# Altium PCB usb_hub.PcbDoc
Units mil, origin at the board's own origin, x right, y up, seen from the top; angles counter-clockwise.
Board outline 1669.29 x 1637.8 mil, 2 copper layers (Top Layer, Bottom Layer); 19 components, 17 nets, 97 pads, 28 vias.
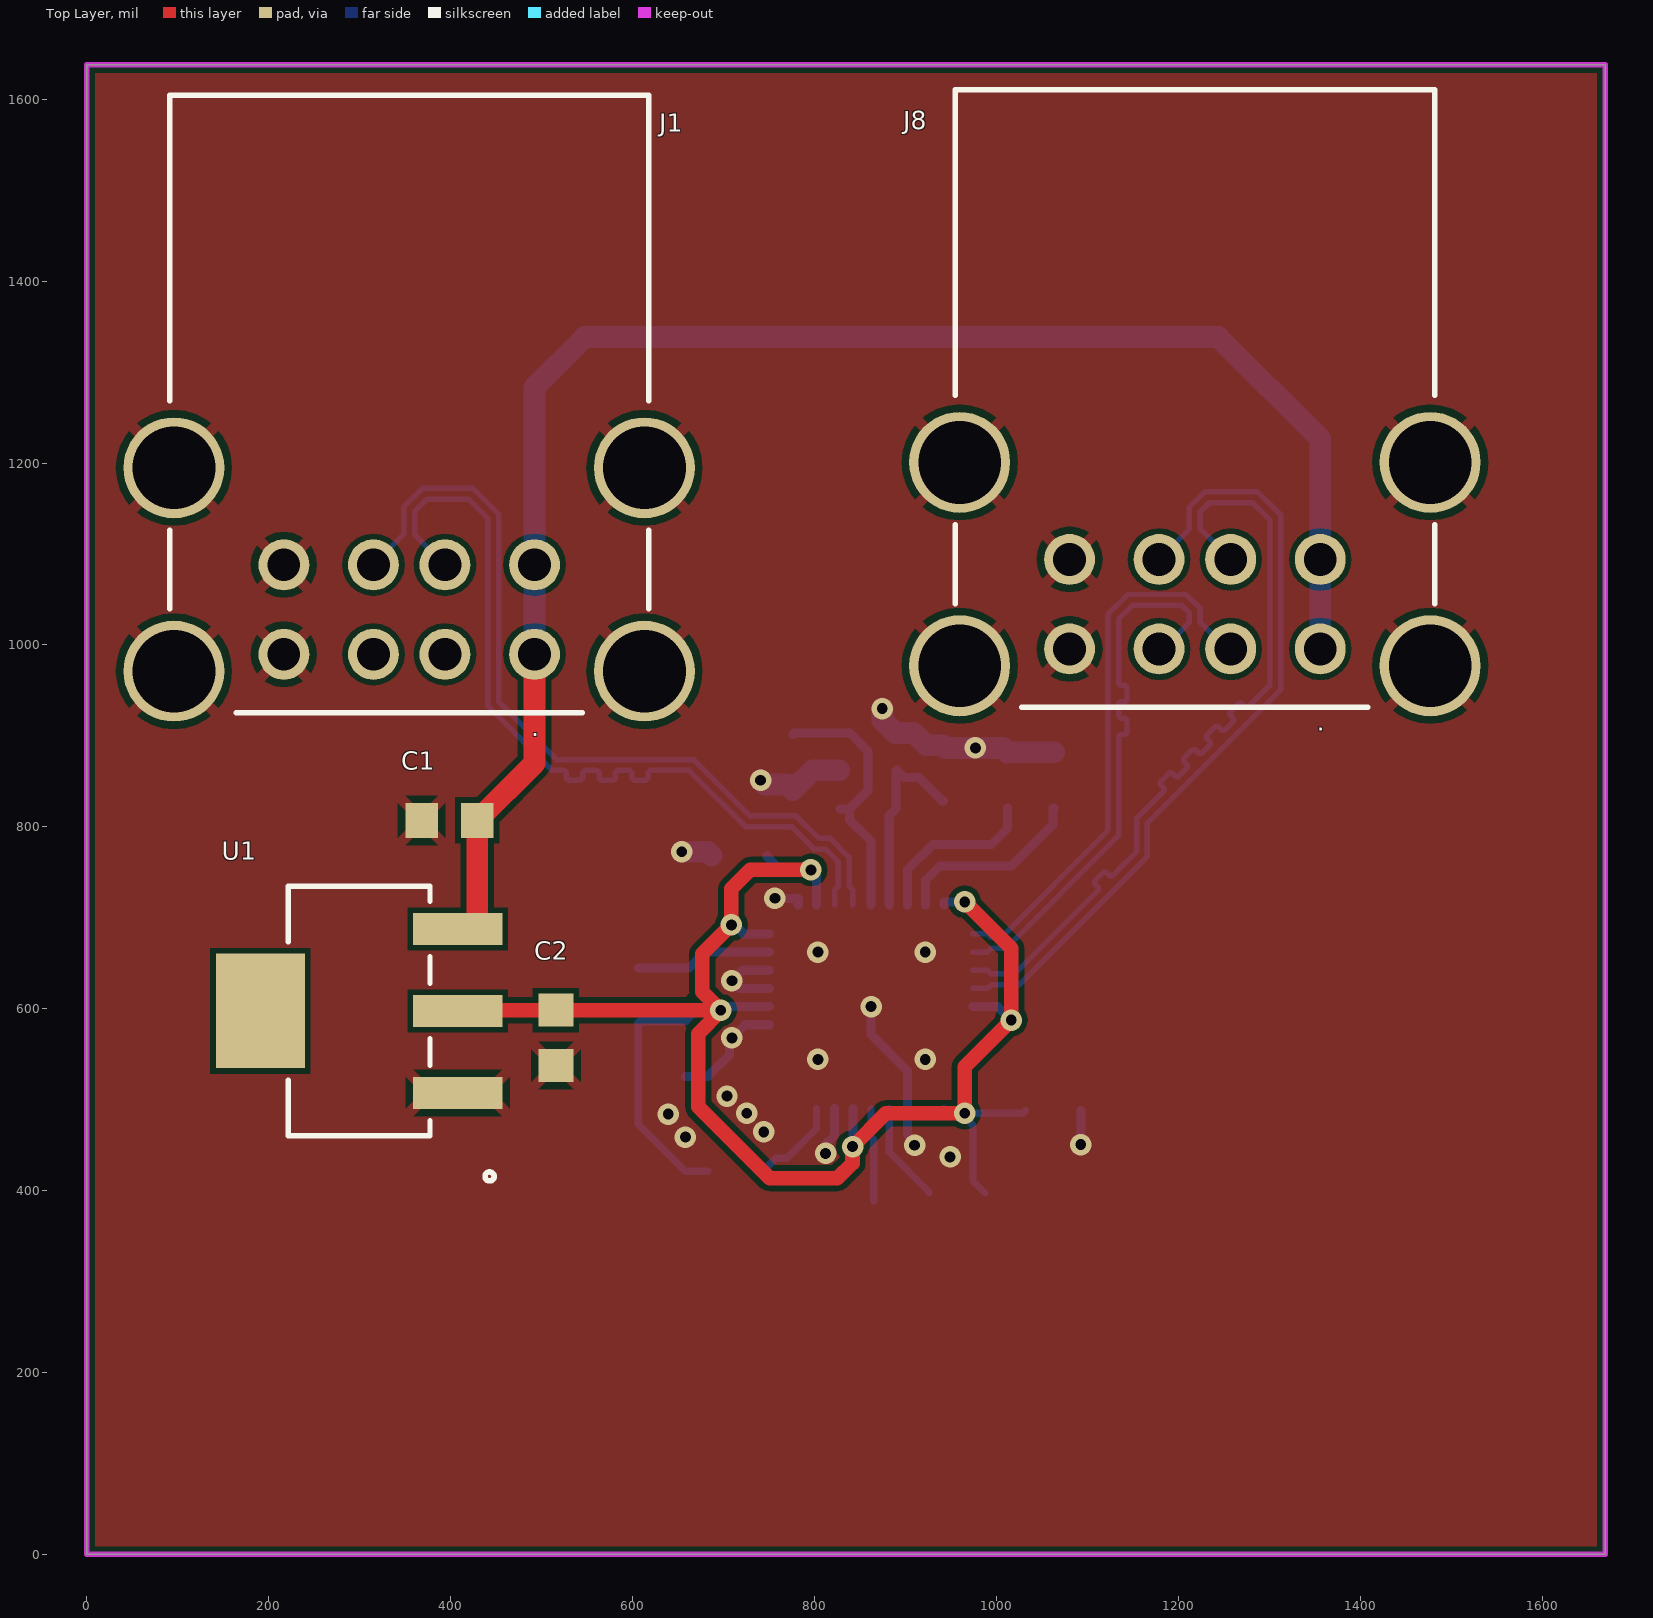
[diagram p0: Top Layer view]
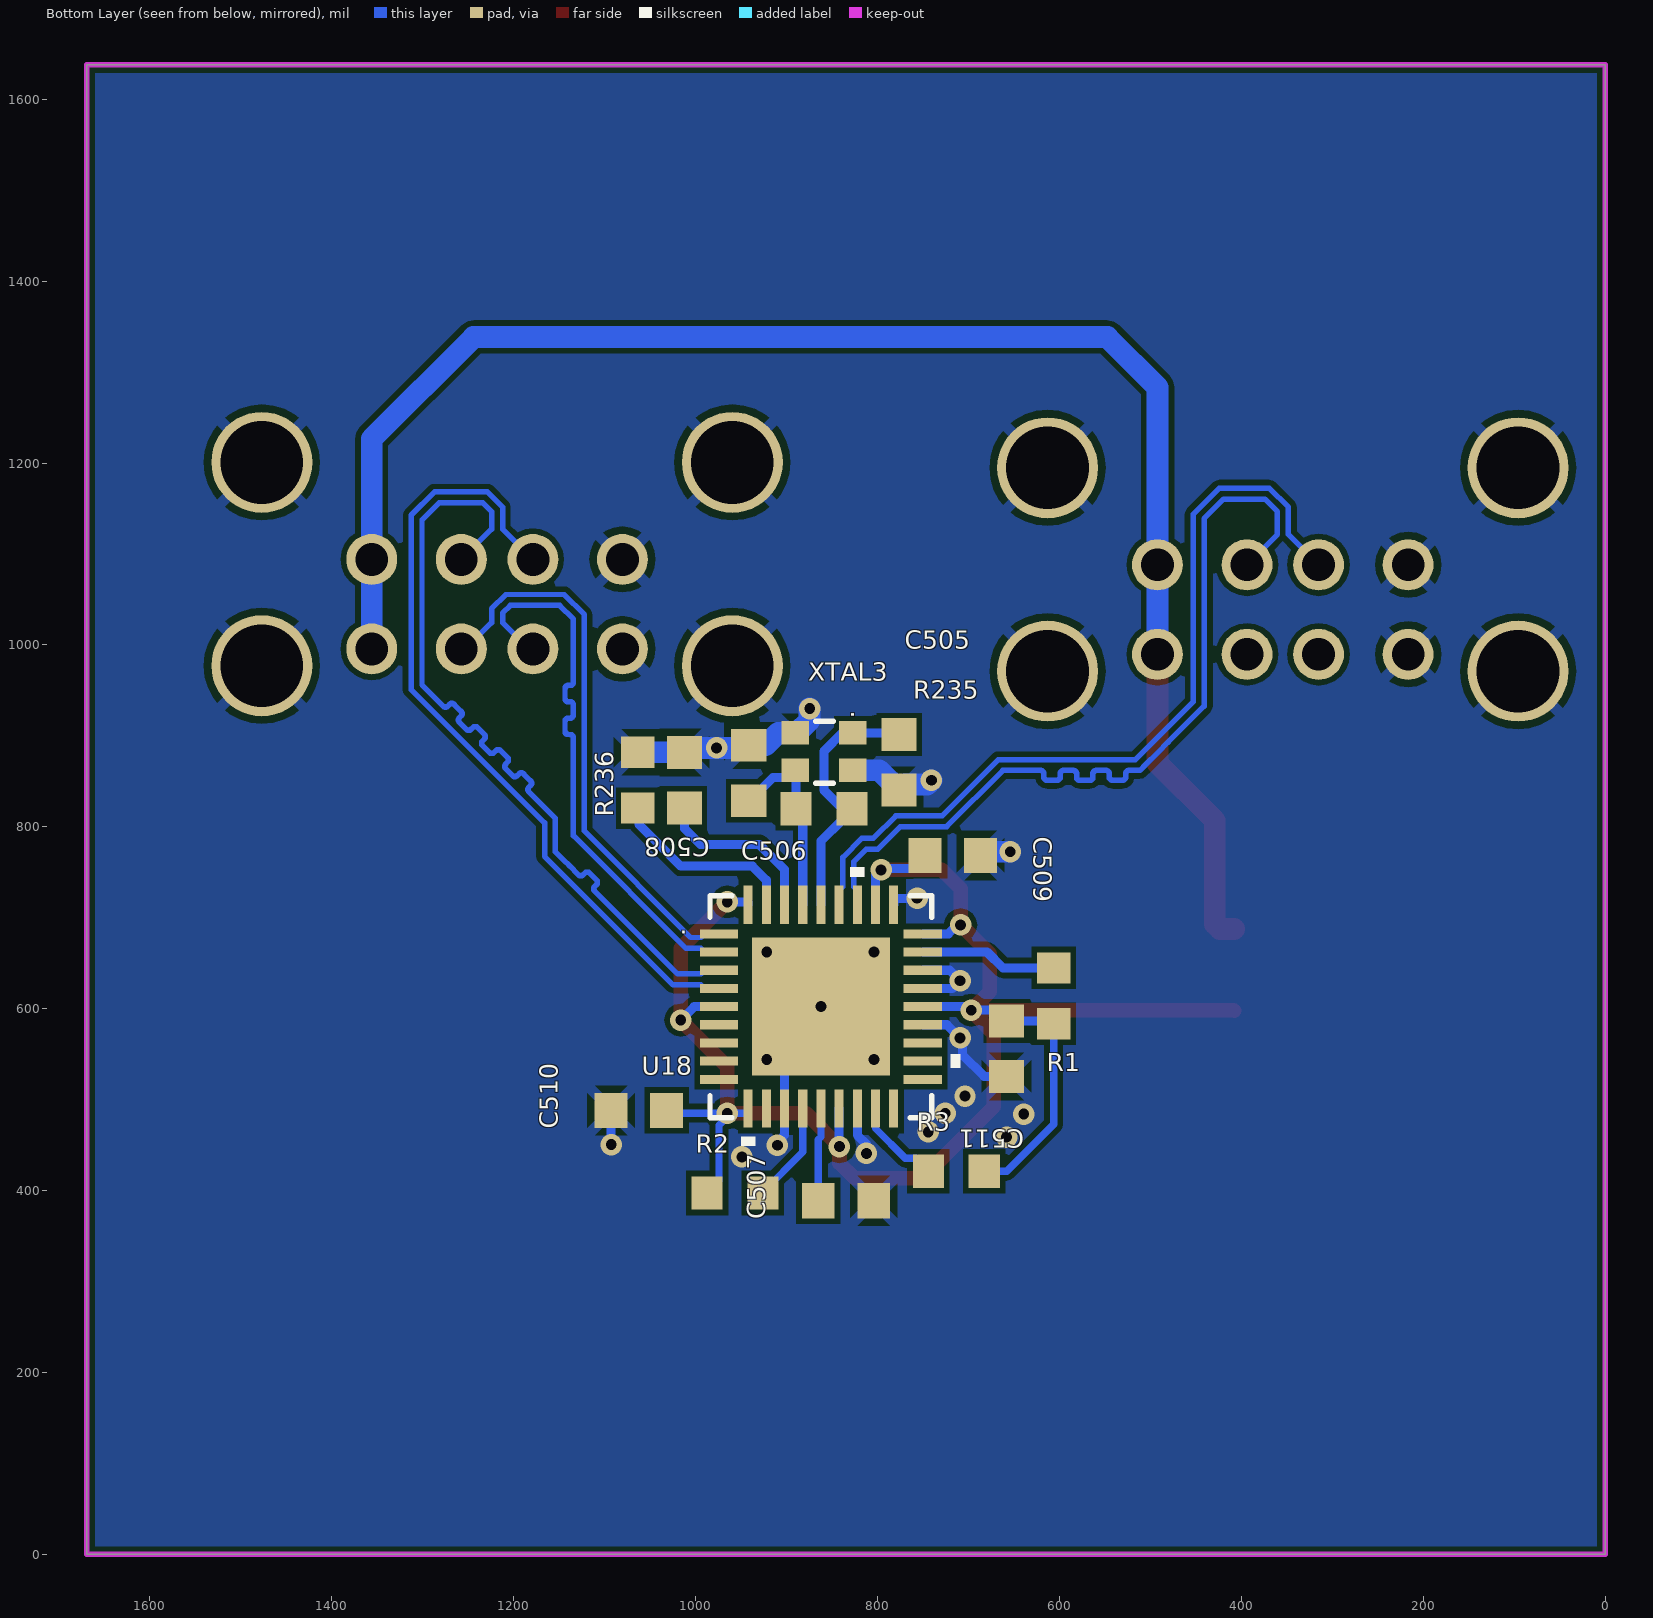
[diagram p1: Bottom Layer view, seen from below]
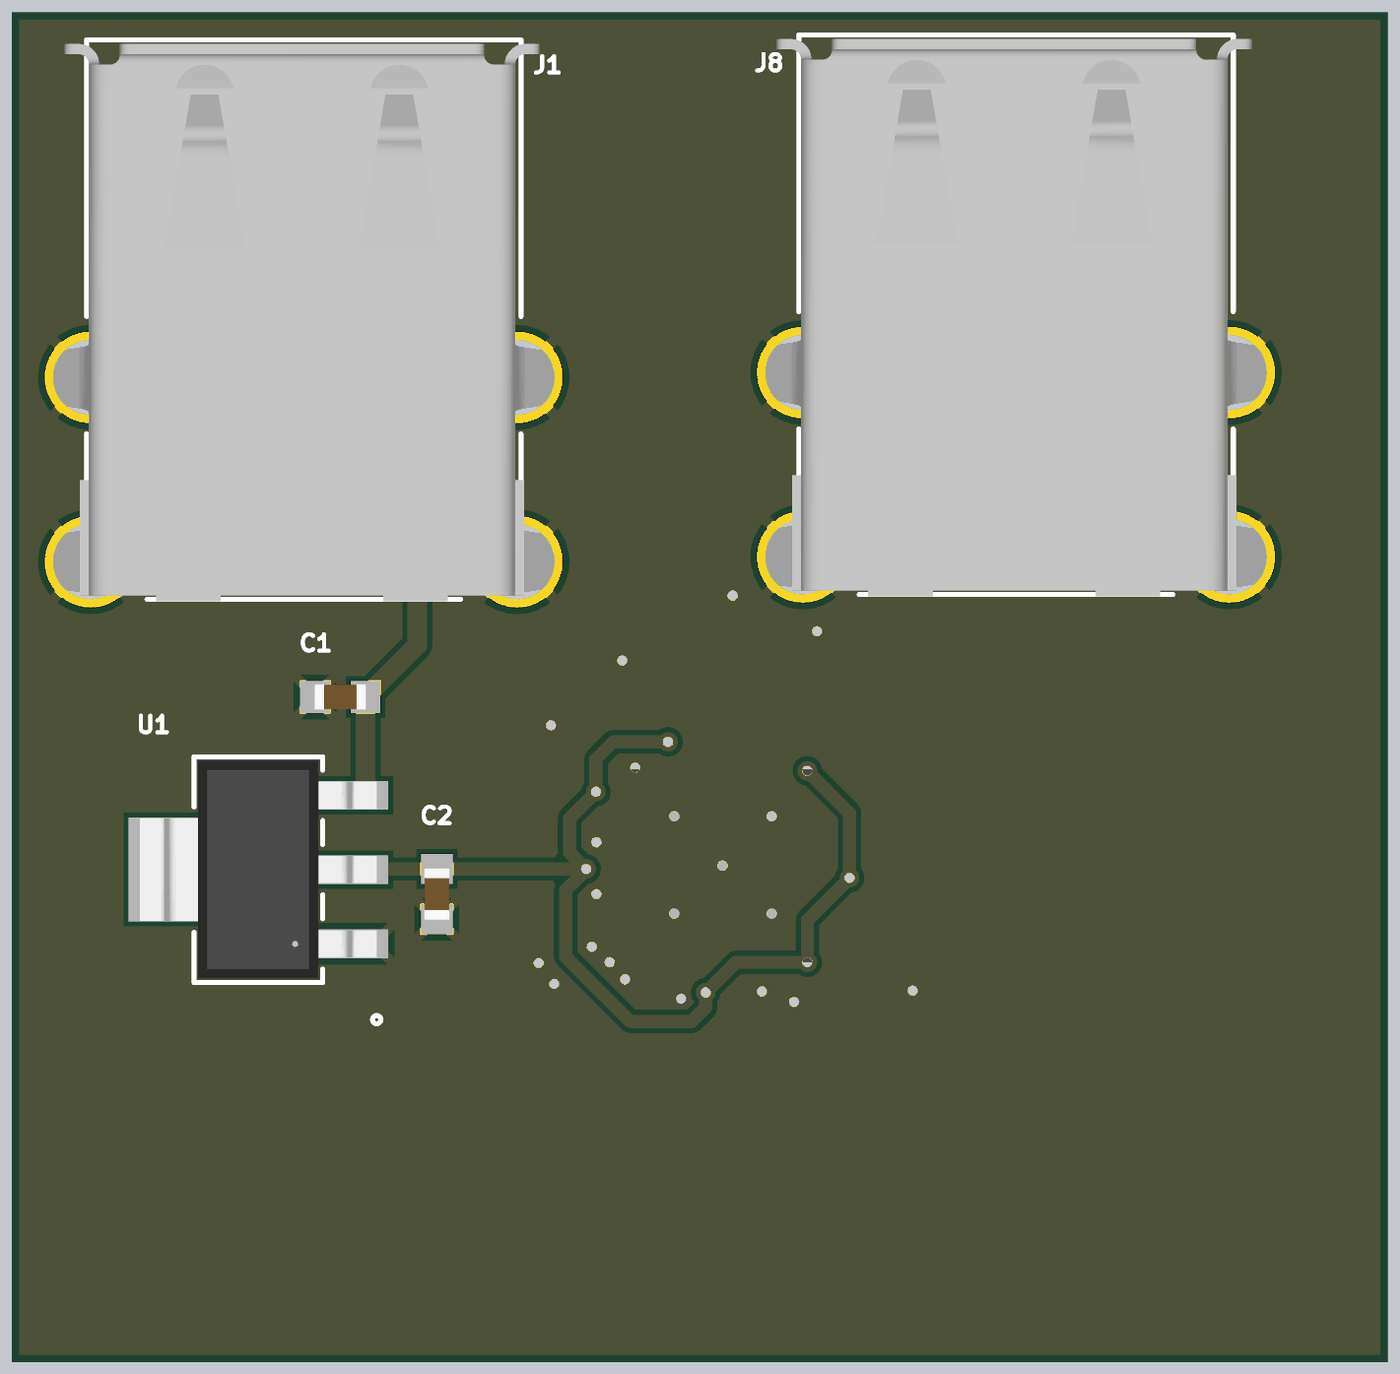
[diagram p2: 3D render of the assembled board from above, using the file's embedded part models]
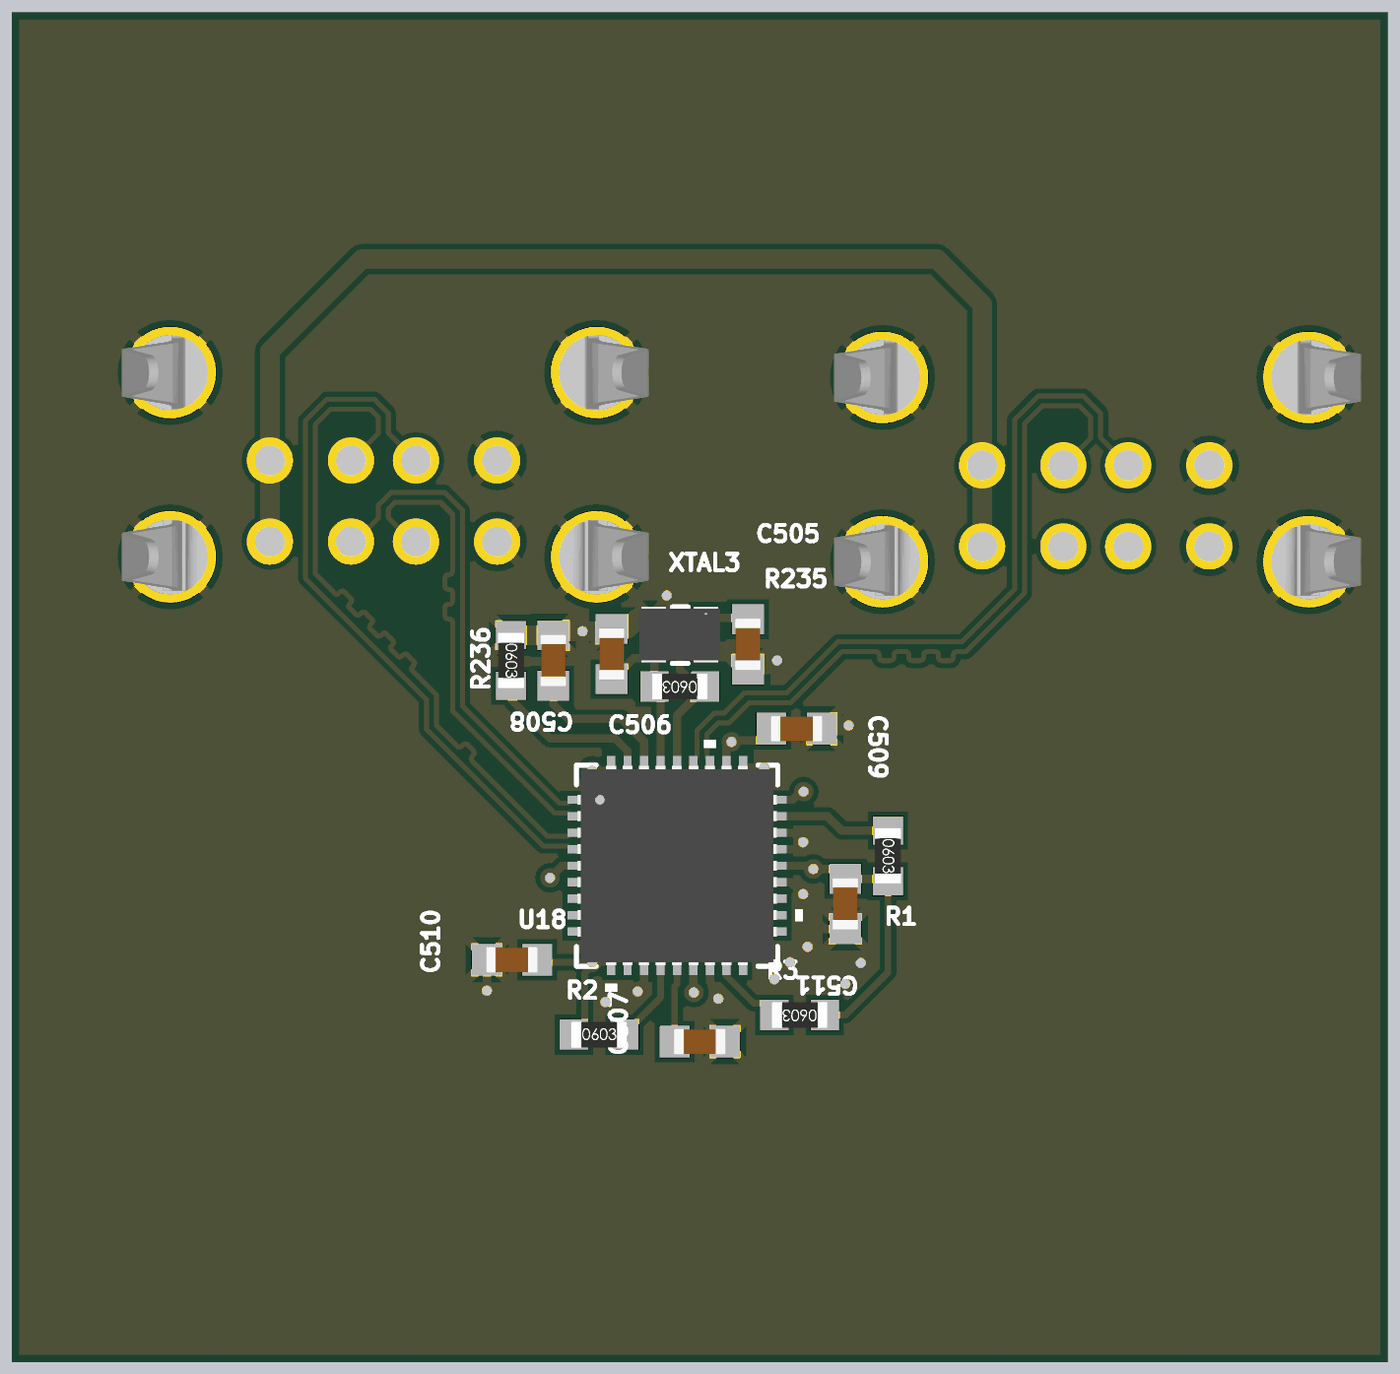
[diagram p3: 3D render of the assembled board from below, using the file's embedded part models]

## Layer stack, top to bottom
Top Solder: solder mask 0.4, Solder Resist, Dk 3.5
Top Layer: signal copper 1.4
Dielectric 1: dielectric 12.6, FR-4, Dk 4.8
Bottom Layer: signal copper 1.4
Bottom Solder: solder mask 0.4, Solder Resist, Dk 3.5

## Board outline
0,0 1669.29,0 1669.29,1637.8 0,1637.8

## Design rules (kind name [scope] priority, off if disabled: settings)
Clearance [All] p1: gap=6 ignorepadtopadclearanceinfootprint=FALSE except(0: Arc-Hole Track-Hole SMDPad-Hole THPad-Hole Via-Hole Fill-Hole Poly-Hole Region-Hole Text-Hole)
DiffPairsRouting [All] p1: maxlimit=10 minlimit=6 mostfreqgap=6 toplayer_minwidth=6 toplayer_maxwidth=15 toplayer_prefwidth=6 bottomlayer_minwidth=6 bottomlayer_maxwidth=15 bottomlayer_prefwidth=6 maxuncoupledlength=500
HoleSize [All] p1: absolutevalues=TRUE maxlimit=236.22 minlimit=1 maxpercent=80.000 minpercent=20.000
HoleToHoleClearance [All] p1: gap=3 allowstackedmicrovias=TRUE
MatchedLengths [InDifferentialPair('USB_DEV','USB_USER0' ,'USB_USER1')] p1: tolerance=3 checknetsindiffpair=TRUE checkdiffpairvsdiffpair=FALSE checkxsignals=FALSE checkothers=FALSE
MinimumSolderMaskSliver [All] p1: minsoldermaskwidth=1
PolygonConnect [All] p1: thpad.connectstyle=Relief thpad.reliefconductorwidth=12 thpad.reliefentries=4 thpad.polygonreliefangle="45 Angle" thpad.airgapwidth=8 smdpad.connectstyle=Relief smdpad.reliefconductorwidth=12 smdpad.reliefentries=4 smdpad.polygonreliefangle="45 Angle" smdpad.airgapwidth=8 via.connectstyle=Direct via.reliefconductorwidth=12 via.reliefentries=4 via.polygonreliefangle="45 Angle" via.airgapwidth=8
RoutingVias [All] p1: holewidth=15.75 width=23.62 viastyle="Through Hole" minholewidth=11.81 minwidth=19.68 maxholewidth=110.24 maxwidth=118.11
SilkToSilkClearance [All] p1: silktosilkclearance=3
SilkToSolderMaskClearance [IsPad] p1: minsilkscreentomaskgap=1 clearancetoexposedcopper=TRUE
SolderMaskExpansion [All] p1: expansion=1
Width [All] p1: maxlimit=40 minlimit=6 preferedwidth=10
24 further rules are at their usual default settings.

## Classes and differential pairs
differential pair class USB_USR1_D: USB_USER1
differential pair class USB_USR0_D: USB_USER0
differential pair class USB_DEV_D: USB_DEV
differential pair USB_USER1: +USB_USER1_P -USB_USER1_N
differential pair USB_USER0: +USB_USER0_P -USB_USER0_N
differential pair USB_DEV: +USB_DEV_P -USB_DEV_N

## Components (designator, comment, footprint, x,y, rotation, side; value= is the part's Value field where it differs from the comment)
C1 "1uF" *CAPC1608X90N 398.62,807.09 r180 top
C2 "1uF" *CAPC1608X90N 515.75,567.91 r270 top
C505 "1uF" *CAPC1608X90N 776.18,871.03 r270 bottom
C506 "1uF" *CAPC1608X90N 941.54,859.22 r90 bottom
C507 "1uF" *CAPC1608X90N 834.65,388.92 r0 bottom
C508 "1uF" *CAPC1608X90N 1012.4,851.34 r270 bottom
C509 "100nF" *CAPC1608X90N 717.13,768.67 r180 bottom
C510 "100nF" *CAPC1608X90N 1062.4,488.19 r0 bottom
C511 "100nF" *CAPC1608X90N 658.07,556.07 r270 bottom
J1 "5787617-1" CONN8_5787617-1_TEC 492.13,1088.14 r180 top
J8 "5787617-1" CONN8_5787617-1_TEC 1356.1,1094.07 r180 top
R1 "1M" *RESC1608X55N 606.3,614.17 r270 bottom
R2 "12k" *RESC1608X55N 956.69,397.41 r180 bottom
R3 "12k" *RESC1608X55N 713.41,421.26 r0 bottom
R235 "1M" *RESC1608X55N 858.86,819.85 r0 bottom
R236 "12k" *RESC1608X55N 1063.58,851.34 r270 bottom
U1 "AMS1117-3.3" SOT_AMS_ADS 299.21,597.6 r90 top
U18 "USB2512BI-AEZG" QFN36_6X6MC_MCH 862.2,602.36 r180 bottom
XTAL3 "24.000MHz" SMD-4_2P5X2_AVX 858.86,882.84 r270 bottom

## Footprints (in the part's own frame and the unit in brackets; to place one, negate y for a bottom-side part, rotate by r counter-clockwise, add the part's x,y. Pads: shape width x height; smd on the part's side, far side on the other; paste and mask are expansions set on the pad)
*CAPC1608X90N [mm]
  rect 0.92x0.98 smd: 1(-0.775,0) 2(0.775,0)
  body extent -0.8,-0.4 0.8,0.4, height 0.6
*RESC1608X55N [mm]
  rect 0.87x0.93 smd: 1(-0.78,0) 2(0.78,0)
  body extent -0.85,-0.4 0.85,0.4, height 0.56
CONN8_5787617-1_TEC [mil]
  round 56 hole 36 mask+0: 1(0,0) 2(98.43,0) 3(177.17,0) 4(275.59,0) 5(0,98.43) 6(98.43,98.43) 7(177.17,98.43) 8(275.59,98.43)
  round 111 hole 91: S(-120.87,116.94) S(-120.87,-106.68) S(396.46,-106.68) S(396.46,116.94)
  silkscreen extent -126,-516 401,163, body extent -180,-511 460,165, height 621
QFN36_6X6MC_MCH [mil]
  rect 42x10 smd paste+0 mask+0: 1(-112,80) 2(-112,60) 3(-112,40) 4(-112,20) 5(-112,0) 6(-112,-20) 7(-112,-40) 8(-112,-60) 9(-112,-80) 19(112,-80) 20(112,-60) 21(112,-40) 22(112,-20) 23(112,0) 24(112,20) 25(112,40) 26(112,60) 27(112,80)
  rect 10x42 smd paste+0 mask+0: 10(-80,-112) 11(-60,-112) 12(-40,-112) 13(-20,-112) 14(0,-112) 15(20,-112) 16(40,-112) 17(60,-112) 18(80,-112) 28(80,112) 29(60,112) 30(40,112) 31(20,112) 32(0,112) 33(-20,112) 34(-40,112) 35(-60,112) 36(-80,112)
  rect 152x152 smd paste-75.5 mask-75.5: 37(0,0)
  silkscreen extent -122,-153 153,153, body extent -121,-121 121,121, height 65
SMD-4_2P5X2_AVX [mil]
  rect 26x30 smd paste+0 mask+0: 1(-20.5,31.69) 2(-20.5,-31.69) 3(20.5,-31.69) 4(20.5,31.69)
  silkscreen extent -33,-9 35,10, body extent -34,-49 34,49, height 22
SOT_AMS_ADS [mil]
  rect 35x98 smd paste+0 mask+0: 1(-90.16,-108.5) 2(0,-108.5) 3(90.16,-108.5)
  rect 126x98 smd paste+0 mask+0: 4(0,108.5)
  silkscreen extent -187,-148 137,78, body extent -132,-143 132,144, height 71

## Part data
C1 C2 C505 C506 C507 C508 C509 C510 C511: library part 06033C103KAT2A, "0603 10 nF 25 V 10% Tolerance X7R Surface Mount Multilayer Ceramic Capacitor", Package="1608 AVX", Availability=Unavailable, MF=AVX, MP=06033C103KAT2A, Price=None, SnapEDA_Link=https://www.snapeda.com/parts/06033C103KAT2A/AVX%20/%20Kyocera/view-part/?ref=snap
J1 J8: "RECP ASSY, R/A, STACKED, THRU-HOLE, USB,", Built_By=EMA_UL_Team, Copyright="Copyright (C) 2016 Accelerated Designs. All rights reserved", Manufacturer_Part_Number=5787617-1, PITCH(MM)=2.5, POSITIONS=8, PRODUCT=Connector, RefDes=RefDes, ROWS/CONFIG=2, SourceLibrary=TE_Connectivity-2018-03-16, TE_Part_Number=5787617-1, Type=DEV, Vendor="TE Connectivity"
R1 R2 R3 R235 R236: library part CR0603-FX-4701ELF, "Res Thick Film 0603 4.7K Ohm 1% 1/10W 100ppm/C Molded SMD SMD Paper Tape on Plastic Reel", Package="1608 Rohm Semiconductor", Availability=Unavailable, MF=Bourns, MP=CR0603-FX-4701ELF, Price=None, SnapEDA_Link=https://www.snapeda.com/parts/CR0603-FX-4701ELF/Bourns/view-part/?ref=snap
U1 U18: "No Description Available", Copyright="Copyright (C) 2018 Accelerated Designs. All rights reserved", RefDes=RefDes, Type=DEV
  U1: Built_By=EMA_Matt, Manufacturer_Part_Number=AMS1117-3.3, SourceLibrary=Advanced_Monolithic_Systems_10-16-2019, Vendor="Advanced Monolithic Systems"
  U18: Built_By=EMA_Jessica, Manufacturer_Part_Number=USB2512BI-AEZG, SourceLibrary=Microchip_2019-08-23_1, Vendor=Microchip
XTAL3: library part CX2520DB25000H0FLJC1, "No Description Available", Built_By=EMA_Anthony, Copyright="Copyright (C) 2018 Accelerated Designs. All rights reserved", Datasheet=https://media.digikey.com/pdf/Data%20Sheets/AVX%20PDFs/CX2520DB_USY1M-H1-16429-00_Spec.pdf, Manufacturer_Part_Number=CX2520DB25000H0FLJC1, RefDes=RefDes, SourceLibrary=AVX_2020-03-05, Type=DEV, Vendor="AVX Corporation"

## Via types
v1: diameter 23.62, hole 11.81, Top Layer to Bottom Layer, tented both sides, 28 vias

## Nets (pads, with @x,y where several pads share a name; then routed paths per layer and width w, separated by ;. In a path a pad name is that pad's centre, name@x,y a point inside that pad or via, vN(x,y) a via of type N, cw(c..) or ccw(c..) an arc to the next point about the centre after c; other vN are vias at no path point)
+3V3: C2.1 C509.1 C510.1 C511.1 R1.2 R2.1 R3.1 U1.2 U18.5 U18.10 U18.15 U18.23 U18.27 U18.29 U18.36 | length 2110
  Top Layer w16: U1.2 408.54,598.43 C2.1 v1(696.85,598.43) ; v1(796.12,752.67) 729.55,752.67 708.66,731.78 v1(708.66,692.17) 676.8,660.31 676.8,618.48 v1(696.85,598.43) ; v1(965.16,717.48) 1016.34,666.3 v1(1016.34,587.56) 965.16,536.38 v1(965.16,485.2) 878.55,485.2 v1(841.81,448.46) 841.81,430.3 824.89,413.39 750.68,413.39 671.94,492.13 671.94,572.69 696.85,597.6 v1(696.85,598.43)
  Bottom Layer w8: R1.2 606.3,472.93 657.96,421.26 R3.1 ; U18.10 942.2,486.2 943.2,485.2 v1(965.16,485.2) ; R2.1 974.28,410.53 974.28,471.86 965.16,480.97 v1(965.16,485.2) ; C510.1 1028.9,485.2 v1(965.16,485.2)
  Bottom Layer w10: R1.2 609.41,586.58 C511.1 670.87,599.37 671.82,598.43 v1(696.85,598.43) 700.79,602.36 U18.23 ; v1(708.66,692.17) 712.35,692.17 722.16,682.36 U18.27 ; C509.1 747.64,767.48 760.75,754.37 794.41,754.37 v1(796.12,752.67) 802.2,746.58 U18.29 ; v1(841.81,448.46) 841.81,450.28 842.2,450.67 U18.15 ; U18.36 942.2,717.48 v1(965.16,717.48) ; U18.5 1001.54,602.36 v1(1016.34,587.56)
+5V_USB: C1.1 J1.1 J1.5 J8.1 J8.5 U1.3 | length 1804.1
  Top Layer w24: U1.3 423.63,687.75 429.13,693.25 C1.1 492.13,870.08 J1.5
  Bottom Layer w24: J1.5 J1.1 492.13,1283.46 547.24,1338.58 1244.09,1338.58 1356.1,1226.57 J8.1 J8.5
GND: C1.2 C2.2 C505.2 C506.2 C507.1 C508.1 C509.2 C510.2 C511.2 J1.4 J1.8 J1.S J8.4 J8.8 J8.S R236.1 U1.1 U18.12 U18.16 U18.22 U18.24 U18.25 U18.28 U18.37 XTAL3.2 XTAL3.4 | length 861.9
  Bottom Layer w10: C511.2 682.68,525.56 706.65,549.52 706.65,565.27 v1(709.25,567.88) 723.74,582.36 U18.22 ; U18.24 717.76,622.36 v1(709.25,630.87) 720.75,642.36 U18.25 ; v1(756.5,721.42) 782.12,721.42 782.12,714.65 782.2,714.56 U18.28 ; v1(812.14,440.94) 812.14,451.06 822.2,461.12 U18.16 ; v1(862.2,602.36) 862.2,571.64 902.2,531.64 U18.12 902.2,461.29 910.04,453.45 v1(910.04,449.77) ; v1(1092.92,450.69) C510.2
  Bottom Layer w24: v1(654.14,772.6) 682.68,772.6 C509.2 ; v1(740.75,851.34) 745.47,846.63 770.07,846.63 C505.2 798.01,862.34 XTAL3.4 ; v1(874.61,930.08) 874.61,917.28 888.55,903.34 XTAL3.2 909.23,903.34 922.84,889.73 C506.2 944.49,886.78 v1(976.97,886.78) 1007.48,886.78 C508.1 1012.5,881.95 1063.49,881.95 R236.1
  other v1: 949.11,437.01 658.07,458.91 744.09,464.57 639.27,484.25 725.44,485.2 703.8,503.94 803.74,544.26 921.85,544.26 803.74,662.36 921.85,662.36
NetC507_2: C507.2 U18.14 | length 102.7
  Bottom Layer w8: U18.14 862.2,458.91 865.16,455.95 C507.2
NetC508_2: C508.2 U18.34 | length 190.1
  Bottom Layer w10: U18.34 902.2,752.96 929.73,780.48 994.54,780.48 1012.4,798.34 C508.2
NetR1_1: R1.1 U18.26 | length 151.1
  Bottom Layer w10: R1.1 662.1,644.88 679.58,662.36 U18.26
NetR2_2: R2.2 U18.13 | length 111.1
  Bottom Layer w8: U18.13 882.2,442.37 925.98,398.59 R2.2
NetR3_2: R3.2 U18.17 | length 100.4
  Bottom Layer w8: R3.2 744.12,422.44 757.24,435.57 769.51,435.57 802.2,468.26 U18.17
NetR236_2: R236.2 U18.35 | length 211.6
  Bottom Layer w10: U18.35 922.2,741.46 937.6,756.85 1016.34,756.85 1062.4,802.92 1062.4,820.63 R236.2
USB_DEV_N: J1.2 U18.30 | length 925.2
  Bottom Layer w6: J1.2 360.33,1121.51 360.33,1146.62 374.01,1160.29 419.29,1160.29 440.76,1138.83 440.76,932.66 480.32,893.11 492.31,881.11 505.04,868.38 511.4,862.02 523.51,862.02 cw(c523.51,858.42) 527.11,858.42 527.11,854.77 ccw(c530.71,854.77) 530.71,851.17 541.51,851.17 ccw(c541.51,854.77) 545.11,854.77 545.11,858.42 cw(c548.71,858.42) 548.71,862.02 559.51,862.02 cw(c559.51,858.42) 563.11,858.42 563.11,854.77 ccw(c566.71,854.77) 566.71,851.17 577.51,851.17 ccw(c577.51,854.77) 581.11,854.77 581.11,858.42 cw(c584.71,858.42) 584.71,862.02 595.51,862.02 cw(c595.51,858.42) 599.11,858.42 599.11,854.77 ccw(c602.71,854.77) 602.71,851.17 613.51,851.17 ccw(c613.51,854.77) 617.11,854.77 617.11,858.42 cw(c620.71,858.42) 620.71,862.02 635.11,862.02 653.11,862.02 662.11,862.02 723.97,800.16 774.96,800.16 799.62,775.51 812.28,775.51 826.2,761.58 826.2,734.36 822.2,730.36 U18.30
USB_DEV_P: J1.3 U18.31 | length 918.4
  Bottom Layer w6: J1.3 348.33,1121.51 348.33,1151.59 369.04,1172.29 424.26,1172.29 452.76,1143.8 452.76,937.63 516.37,874.02 667.08,874.02 728.94,812.16 779.93,812.16 804.59,787.51 817.25,787.51 838.2,766.55 838.2,734.36 842.2,730.36 U18.31
USB_USER0_N: J8.6 U18.1 | length 614.6
  Bottom Layer w6: U18.1 990.2,682.36 994.2,678.36 1005.37,678.36 1122.45,795.44 1122.45,1033.48 1144.47,1055.5 1208.7,1055.5 1224.31,1039.89 1224.31,1024.57 1253.23,995.65 J8.6
USB_USER0_P: J8.7 U18.2 | length 619.1
  Bottom Layer w6: U18.2 990.2,662.36 994.2,666.36 1010.34,666.36 1134.45,790.47 1134.45,862.2 1134.45,897.97 cw(c1138.05,897.97) 1138.05,901.57 1140.04,901.57 ccw(c1140.04,905.17) 1143.64,905.17 1143.64,915.97 ccw(c1140.04,915.97) 1140.04,919.57 1138.05,919.57 cw(c1138.05,923.17) 1134.45,923.17 1134.45,933.97 cw(c1138.05,933.97) 1138.05,937.57 1140.04,937.57 ccw(c1140.04,941.17) 1143.64,941.17 1143.64,951.97 ccw(c1140.04,951.97) 1140.04,955.57 1138.05,955.57 cw(c1138.05,959.17) 1134.45,959.17 1134.45,964.57 1134.45,1028.51 1149.44,1043.5 1203.73,1043.5 1212.31,1034.92 1212.31,1024.57 1183.39,995.65 J8.7
USB_USER1_N: J8.2 U18.3 | length 886.8
  Bottom Layer w6: U18.3 990.2,642.36 994.2,638.36 1019.9,638.36 1106.3,724.77 1110.95,729.41 ccw(c1108.4,731.96) 1110.95,734.51 1108.97,736.49 cw(c1111.51,739.03) 1108.97,741.58 1116.6,749.21 cw(c1119.15,746.67) 1121.7,749.21 1123.68,747.23 ccw(c1126.22,749.78) 1128.77,747.23 1138.95,757.42 1145.31,763.78 1154.14,772.6 1154.14,809.26 1160.5,815.62 1173.23,828.35 1183.41,838.53 ccw(c1180.86,841.08) 1183.41,843.62 1181.43,845.6 cw(c1183.98,848.15) 1181.43,850.69 1189.07,858.33 cw(c1191.61,855.79) 1194.16,858.33 1196.14,856.35 ccw(c1198.68,858.9) 1201.23,856.35 1208.87,863.99 ccw(c1206.32,866.53) 1208.87,869.08 1206.89,871.06 cw(c1209.43,873.6) 1206.89,876.15 1214.52,883.79 cw(c1217.07,881.24) 1219.61,883.79 1221.59,881.81 ccw(c1224.14,884.35) 1226.68,881.81 1234.32,889.44 ccw(c1231.78,891.99) 1234.32,894.54 1232.34,896.52 cw(c1234.89,899.06) 1232.34,901.61 1239.98,909.24 cw(c1242.52,906.7) 1245.07,909.24 1247.05,907.26 ccw(c1249.59,909.81) 1252.14,907.26 1259.78,914.9 ccw(c1257.23,917.45) 1259.78,919.99 1257.8,921.97 cw(c1260.34,924.52) 1257.8,927.06 1265.43,934.7 cw(c1267.98,932.15) 1270.53,934.7 1272.51,932.72 ccw(c1275.05,935.26) 1277.6,932.72 1291.34,946.46 1300.87,955.99 1300.87,1137.68 1282.19,1156.36 1234.05,1156.36 1224.31,1146.62 1224.31,1127.44 J8.2
USB_USER1_P: J8.3 U18.4 | length 877.4
  Bottom Layer w6: U18.4 990.2,622.36 994.2,626.36 1024.87,626.36 1166.14,767.63 1166.14,804.29 1312.87,951.02 1312.87,1142.65 1287.16,1168.36 1229.08,1168.36 1212.31,1151.59 1212.31,1127.44 J8.3
USBH_XIN: C506.1 R235.2 U18.33 XTAL3.3 | length 216.4
  Bottom Layer w10: U18.33 882.2,812.48 R235.2 889.57,861.35 XTAL3.3 898.55,854.34 914.72,854.34 940.36,828.7 C506.1
USBH_XOUT: C505.1 R235.1 U18.32 XTAL3.1 | length 289.2
  Bottom Layer w10: C505.1 777.98,903.34 XTAL3.1 838.64,903.34 858.86,883.12 858.86,840.22 R235.1@838.49,819.85 ; R235.1 R235.1@838.49,819.85 ; U18.32 862.2,784.32 838.49,808.04 R235.1@838.49,819.85
pads on no net: J1.6 J1.7 U1.4 U18.6 U18.7 U18.8 U18.9 U18.11 U18.18 U18.19 U18.20 U18.21

## Polygon pours and split planes (outlines as drawn)
GND on Top Layer "GND_L01_P000" (solid, remove dead copper, pour order 0): 0,0 1669.29,0 1669.29,1637.8 0,1637.8
GND on Bottom Layer "GND_L02_P002" (solid, remove dead copper, pour order 2): 0,0 1669.29,0 1669.29,1637.8 0,1637.8

## Keep-outs
Keep-Out Layer:
  the board outline again, w6